# Altium PCB PCB1.PcbDoc (part 2 of 2)
Units mm, origin at the board's own origin, x right, y up, seen from the top; angles counter-clockwise.
Board outline 62.36 x 41.38 mm, 2 copper layers (Top Layer, Bottom Layer), stack 1.671 mm thick; 52 components, 47 nets, 174 pads, 61 vias.
Unrouted connection lines stored in the file: 1.
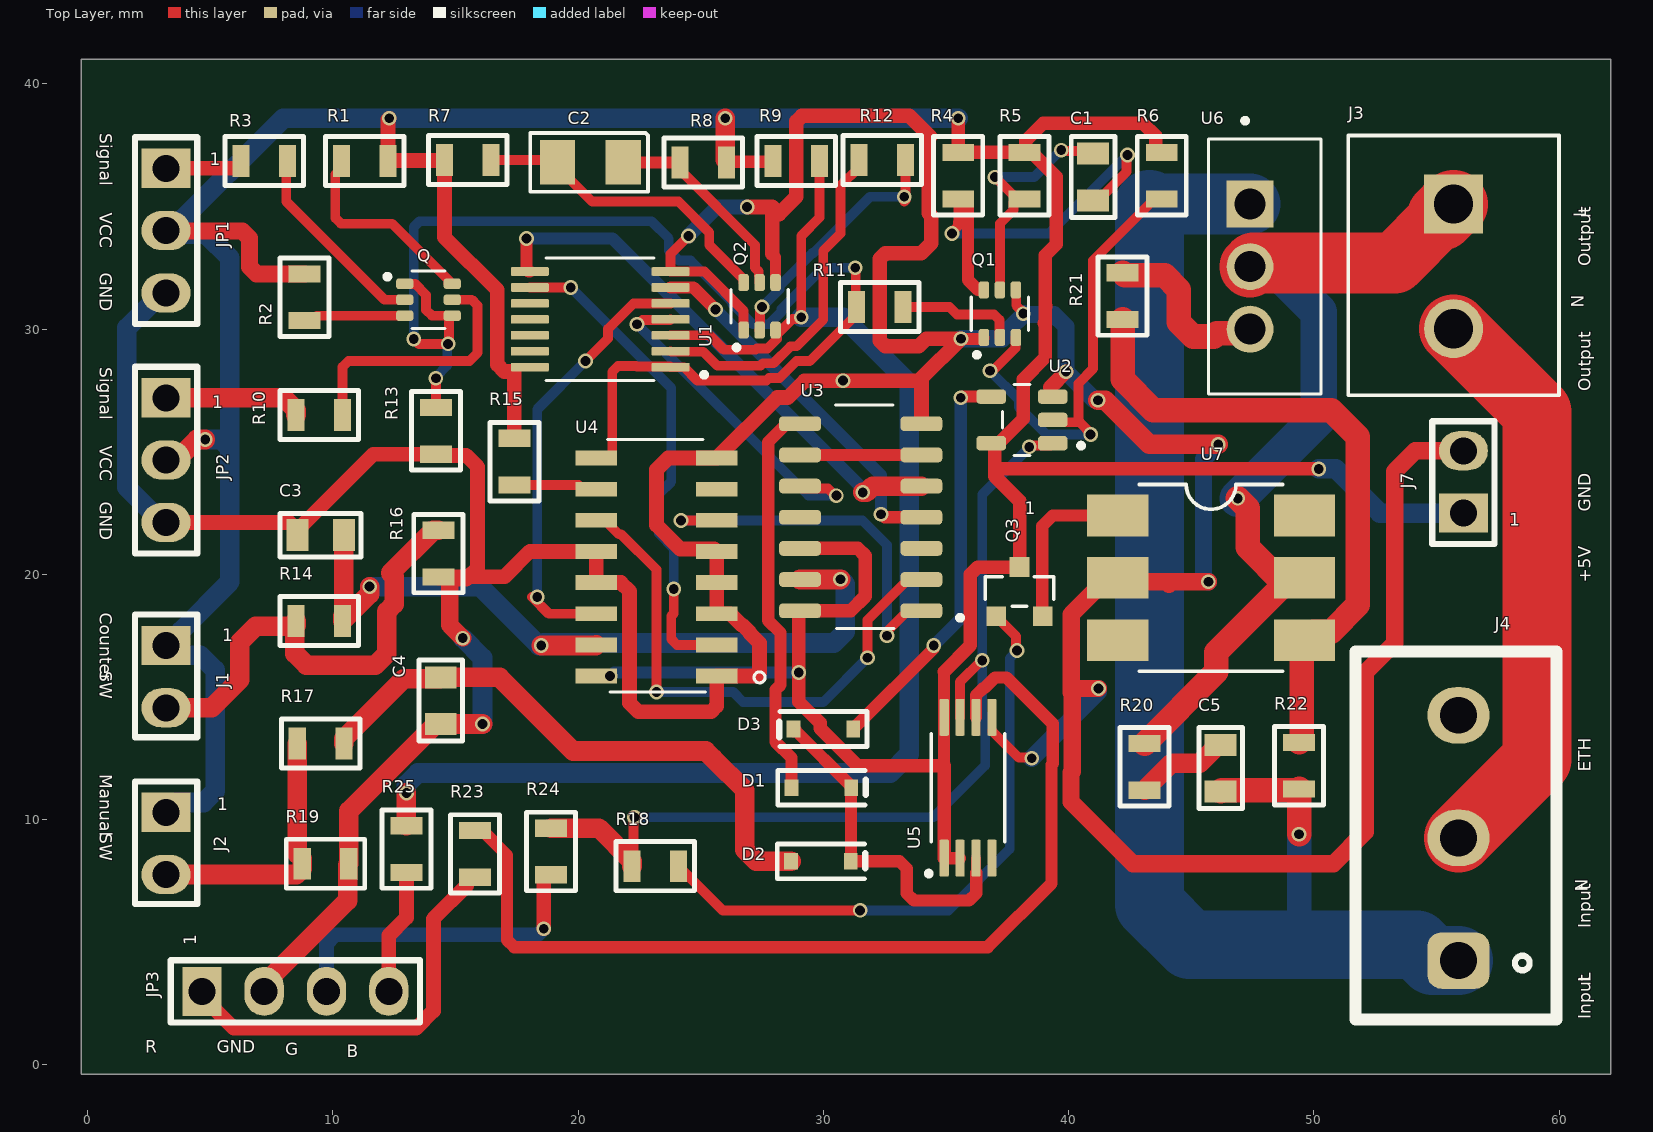
[diagram p0: Top Layer view]

## Via types
v1: diameter 0.6, hole 0.4, Top Layer to Bottom Layer, 61 vias

## Nets (pads, with @x,y where several pads share a name; then routed paths per layer and width w, separated by ;. In a path a pad name is that pad's centre, name@x,y a point inside that pad or via, vN(x,y) a via of type N, cw(c..) or ccw(c..) an arc to the next point about the centre after c; other vN are vias at no path point) (continued)
GND: (continued)
  Bottom Layer w0.6: v1(24.5,33.8) 25.683,34.983 v1(26.892,34.983)
  Bottom Layer w0.7: v1(35.616,29.61) 37.31,29.61 37.593,29.893 37.593,30.023 38.15,30.58 v1(38.15,30.634) ; v1@38.3,30.6 39.4,30.6 39.894,30.106 v1(39.894,28.268) 41.024,27.138 41.162,27.138 v1(41.2,27.1) ; v1(38.5,12.5) 41.217,15.217 v1(41.217,15.35) ; v1(45.7,19.7) 45.5,19.9 45.5,24.7 v1(46.1,25.3)
  Bottom Layer w0.8: JP2.3 3.028,22.12 1.6,23.548 1.6,30.05 3.028,31.478 JP1.3 ; v1(15.3,17.4) 16.1,16.6 v1(16.1,13.9)
"Line IN": C5.1 J4.1 R22.2 U6.1 | length 55.9
  Top Layer w1: C5.1 46.25,11.2 49.35,11.2 R22.2 v1(49.4,9.4)
  Bottom Layer w1: v1(49.4,9.4) 49.4,5.1 49.6,4.9
  Bottom Layer w2.5: 43.3,35.1 U6.1
  Bottom Layer w2.8: 43.3,35.1 43.3,6.54 44.94,4.9 49.6,4.9 54.2,4.9 54.847,4.253 J4.1
"Line OUT": J3.1 R20.2 U6.2 U7.5 | length 35
  Top Layer w1: R20.2 46.028,16.028 46.028,16.817 48.805,19.595 47.3,21.1 47.3,22.7 v1(46.9,23.1)
  Top Layer w2.5: U6.2 47.545,32.695 53.295,32.695 J3.1@55.2,34.6
  Top Layer w2.8: J3.1@55.2,34.6 J3.1
  Bottom Layer w1.5: v1(46.9,23.1) 50.2,26.4 50.2,30.7 48.428,32.472 47.478,32.472 U6.2
N: J3.2 J4.2 | length 23.5
  Top Layer w2.8: J3.2 59.1,26.62 59.1,12.453 J4.2
NetC1_1: C1.1 Q1.6 R4.1 | length 17
  Top Layer w0.4: v1(35.25,33.9) 35.25,33.954 35.479,34.183 35.479,34.379 35.5,34.4 R4.1 ; 36.307,31.6 Q1.6 ; C1.1 41.2,35.254 42.362,36.416 42.362,37.062 v1(42.4,37.1)
  Top Layer w0.5: R4.1 35.8,35.305 35.9,35.205 35.9,32.007 36.307,31.6
  Bottom Layer w0.4: v1(35.25,33.9) 39.2,33.9 v1(42.4,37.1)
NetC1_2: C1.2 Q1.5 R5.1 | length 10.4
  Top Layer w0.4: v1(37,36.2) 37.005,36.2 R5.1@37.9,35.305 ; Q1.5 37.2,34.305 37.75,34.855 37.75,35.155 R5.1@37.9,35.305 ; v1(39.7,37.3) 39.738,37.262 40.892,37.262 C1.2 ; R5.1@37.9,35.305 R5.1 R5.1@37.9,35.305
  Bottom Layer w0.4: v1(37,36.2) 38.6,36.2 v1(39.7,37.3)
NetC2_1: C2.1 Q2.6 R7.1 | length 12.9
  Top Layer w0.4: R7.1 19.064,36.9 C2.1 19.164,36.61 20.574,35.2 24.09,35.2 25.348,33.942 25.348,33.437 26.735,32.05 26.735,31.915 Q2.6
NetC2_2: C2.2 Q2.5 R8.1 | length 8.6
  Top Layer w0.4: R8.1 24.15,36.5 27.217,33.433 27.217,32.501 27.365,32.353 27.365,32.165 27.385,32.145 27.385,31.915 Q2.5
  Top Layer w0.5: C2.2 R8.1
NetC5_2: C5.2 R20.1 | length 3.7
  Top Layer w0.8: R20.1 44.2,12.3 45.35,12.3 C5.2@46.05,13
NetJ1_2: J1.2 R14.1 R16.1 | length 19.1
  Top Layer w0.8: J1.2 5.06,14.56 6.2,15.7 6.2,17.231 6.849,17.88 R14.1@8.449,17.88 ; R14.1 8.499,17.93 R14.1@8.449,17.88 ; R16.1 14.1,21.8 12.357,20.057 12.5,19.914 12.5,18.787 12.2,18.487 12.2,16.769 11.731,16.3 8.918,16.3 8.449,16.769 R14.1@8.449,17.88
NetJ2_2: J2.2 R17.1 R19.1 | length 10.8
  Top Layer w0.8: J2.2 8.51,7.76 8.75,8 R19.1 8.75,8.4 8.55,8.6 R17.1
NetJP1_1: JP1.1 R3.1 | length 3.3
  Top Layer w0.6: JP1.1 6.2,36.558 6.25,36.608 R3.1
NetJP2_1: JP2.1 R10.1 | length 5.7
  Top Layer w0.8: JP2.1 7.999,27.2 8.499,26.7 R10.1
NetJP3_1: JP3.1 R23.2 | length 16.8
  Top Layer w0.6: JP3.1 4.66,2.8 5.96,1.5 13.4,1.5 14.1,2.2 14.1,5.95 15.45,7.3 15.45,7.6 15.5,7.65 R23.2
NetJP3_3: JP3.3 R24.2 | length 13.5
  Top Layer w0.6: v1(18.6,5.55) 18.6,7.7 18.65,7.75 R24.2
  Bottom Layer w0.6: JP3.3 9.74,4.949 10.091,5.3 18.35,5.3 v1(18.6,5.55)
NetJP3_4: JP3.4 R25.2 | length 5.1
  Top Layer w0.6: JP3.4 12.28,5.275 13,5.995 R25.2
NetQ1_2: Q1.2 R11.2 | length 4.9
  Top Layer w0.4: R11.2 35.15,30.9 35.45,30.6 36.966,30.6 37.185,30.381 37.185,29.675 Q1.2
NetQ2_2: Q2.2 R12.2 | length 10.7
  Top Layer w0.4: Q2.2 27.415,29.975 27.415,30.761 27.5,30.846 v1(27.5,30.9) ; v1(33.3,35.4) 33.3,35.2 33.35,35.25 R12.2
  Bottom Layer w0.4: v1(27.5,30.9) 28.216,31.616 28.216,31.764 29.551,33.1 29.6,33.1 31.9,35.4 v1(33.3,35.4)
NetQ3_1: Q3.1 R18.2 | length 25.2
  Top Layer w0.4: R18.2 25.9,6.3 v1(31.5,6.3) ; Q3.1 37.862,17.478 37.862,16.938 v1(37.9,16.9)
  Bottom Layer w0.4: v1(31.5,6.3) 35.1,6.3 37.6,8.8 37.6,16.566 37.9,16.866 v1(37.9,16.9)
NetQ3_2: Q3.2 U7.1 | length 6.9
  Top Layer w0.5: Q3.2 38.95,18.42 38.93,18.44 38.93,21.977 39.353,22.4 U7.1
NetQ_2: Q.2 R3.2 | length 8.2
  Top Layer w0.4: R3.2 8.1,36.805 8.1,35.2 12.1,31.2 Q.2
NetQ_3: Q.3 R2.1 | length 4.2
  Top Layer w0.4: R2.1 9.149,30.35 9.349,30.55 Q.3
NetQ_5: Q.5 R10.2 | length 10.8
  Top Layer w0.4: R10.2 10.399,28.465 10.634,28.7 15.566,28.7 15.9,29.034 15.9,30.966 15.666,31.2 Q.5
NetQ_6: Q.6 R1.1 | length 8.4
  Top Layer w0.4: R1.1 10.35,36.555 10.1,36.305 10.1,34.534 10.334,34.3 12.42,34.3 14.72,32 14.72,31.865 14.735,31.85 Q.6
NetR15_1: R15.1 U4.10 | length 3.4
  Top Layer w0.4: R15.1 20.02,23.65 20.195,23.475 U4.10
NetR21_1: R21.1 R22.1 U7.4 | length 26.9
  Top Layer w1: R21.1 42.2,27.956 43.456,26.7 50.714,26.7 51.8,25.614 51.8,18.756 50.714,17.67 49.97,17.67 49.51,17.21 49.51,13.26 R22.1
NetR21_2: R21.2 U6.3 | length 7.2
  Top Layer w1: R21.2 42.3,32.2 43.914,32.2 44.5,31.614 44.5,30.286 45.086,29.7 45.914,29.7 46.04,29.826 47.226,29.826 U6.3
Q: R18.1 R24.1 U2.1 U5.7 | length 38.9
  Top Layer w0.4: R18.1 22.262,8.162 22.262,10.062 v1(22.3,10.1) ; U5.7 35.575,15.624 36.445,16.494 v1(36.481,16.494) ; v1(38.4,25.2) 38.454,25.2 38.509,25.255 39.26,25.255 U2.1
  Top Layer w0.8: R24.1 20.85,9.65 22.2,8.3 R18.1
  Bottom Layer w0.4: v1(22.3,10.1) 34.5,10.1 36.6,12.2 36.6,14.223 36.481,14.342 36.481,23.263 38.4,25.183 v1(38.4,25.2)
Q_BAR: R23.1 U5.6 | length 40.2
  Top Layer w0.5: R23.1 16.1,9.55 17.1,8.55 17.1,5.093 17.393,4.8 36.7,4.8 39.3,7.4 39.3,12.239 39.35,12.289 39.35,13.916 37.466,15.8 37,15.8 36.57,15.37 36.526,15.37 36.225,15.069 U5.6
"SENSOR INVERTED": R12.1 U1.2 | length 14.4
  Top Layer w0.4: U1.2 23.795,29.075 25.106,29.075 25.671,28.51 27.44,28.51 27.54,28.61 27.966,28.61 28.656,29.3 28.901,29.3 30,30.399 30,33.2 30.7,33.9 30.7,35.85 31.45,36.6 R12.1
"Sensor OUT": Q.1 Q.4 R11.1 R13.2 U1.1 U4.9 | length 51.5
  Top Layer w0.4: Q.1 12.945,31.835 13.363,31.835 13.8,31.398 13.8,30.784 14.034,30.55 Q.4@14.735,30.55 ; v1(13.3,29.6) 13.5,29.4 v1(14.7,29.4) 14.738,29.438 14.738,30.547 Q.4@14.735,30.55 ; R13.2 v1(14.2,28) ; Q.4 Q.4@14.735,30.55 ; U4.9 21.295,24.745 21.395,24.845 21.395,28.266 21.629,28.5 22.37,28.5 22.395,28.475 23.745,28.475 U1.1 24.32,28.45 24.86,27.91 27.689,27.91 27.789,28.01 28.215,28.01 28.905,28.7 29.45,28.7 31.35,30.6 R11.1 31.325,30.925 31.325,32.475 v1(31.3,32.5)
  Bottom Layer w0.4: v1(13.3,29.6) 13.3,34.166 13.534,34.4 22.99,34.4 23.7,33.69 23.7,33.21 24.11,32.8 24.59,32.8 26.3,31.09 26.3,31.019 27.119,30.2 27.79,30.2 28.3,30.71 28.3,30.82 29.98,32.5 v1(31.3,32.5) ; v1(14.2,28) 14.2,28.054 14.662,28.516 14.662,29.362 v1(14.7,29.4)
"Sensor Reset": Q1.3 R6.1 U2.2 | length 19.8
  Top Layer w0.4: v1(36.8,28.3) 36.838,28.338 36.946,28.338 37.835,29.227 37.835,29.645 Q1.3 ; U2.2 39.45,26.205 40.129,26.205 40.134,26.2 40.466,26.2 ; v1(40.9,25.7) 40.9,25.754 40.466,26.188 40.466,26.2 ; R6.1 43.5,35.305 41,32.805 41,28.384 40.4,27.784 40.4,26.266 40.466,26.2
  Bottom Layer w0.4: v1(36.8,28.3) 37.969,27.131 37.969,26.831 39.1,25.7 v1(40.9,25.7)
"SW O/P": C3.1 R14.2 U3.13 U4.15 | length 32.1
  Top Layer w0.8: C3.1 10.45,18.351 10.399,18.3 R14.2 11.5,19.201 v1(11.5,19.5) ; v1(18.5,17.1) 20.72,17.1 U4.15 ; U3.13 30.69,19.79 v1(30.7,19.8)
  Bottom Layer w0.8: v1(11.5,19.5) 16,19.5 18.4,17.1 v1(18.5,17.1) 18.6,17.2 30.431,17.2 30.9,17.669 30.9,19.6 v1(30.7,19.8)
"TRIGGER iNVERTED": U1.4 U3.10 | length 14.1
  Top Layer w0.4: v1(22.4,30.2) 22.454,30.2 22.629,30.375 23.745,30.375 U1.4 ; U3.10 29.15,23.5 30.19,23.5 30.478,23.212 v1(30.532,23.212)
  Bottom Layer w0.4: v1(22.4,30.2) 29.388,23.212 v1(30.532,23.212)
"Trigger O/P": Q2.3 R9.1 R25.1 U1.3 | length 56.3
  Top Layer w0.4: U1.3 25.35,29.75 25.94,29.16 27.242,29.16 27.292,29.21 27.718,29.21 28.108,29.601 28.108,29.781 28.745,30.418 29.1,30.418 29.1,33.8 29.85,34.55 R9.1
  Top Layer w0.8: R25.1 v1(13,11.086)
  Bottom Layer w0.8: v1(13,11.086) 13,11.431 13.469,11.9 32.731,11.9 33.5,12.669 33.5,27.8 30.812,30.488 v1(29.1,30.488)
pads on no net: J4.3 U1.10 U1.11 U1.12 U1.13 U3.3 U3.11 U4.7 U5.4 U7.3 U7.6

## Silkscreen, mask and mechanical layers (free items; w line width, h text height)
Top Overlay:
  text "Signal" at 0.5,37.98 h0.5 r270
  text "VCC" at 0.5,34.739 h0.5 r270
  text "L" at 61.1,34.56 h0.5 r90
  text "Output" at 61.3,32.56 h0.5 r90
  text "GND" at 0.5,32.306 h0.5 r270
  text "N" at 61,30.874 h0.5 r90
  text "Signal" at 0.5,28.447 h0.5 r270
  text "Output" at 61.3,27.46 h0.5 r90
  text "VCC" at 0.5,25.239 h0.5 r270
  text "GND" at 0.5,22.966 h0.5 r270
  text "GND" at 61.3,22.56 h0.5 r90
  text "+5V" at 61.3,19.66 h0.5 r90
  text "Counter" at 0.5,18.44 h0.5 r270
  text "SW" at 0.5,16.04 h0.5 r270
  text "ETH" at 61.3,11.96 h0.5 r90
  text "Manual" at 0.5,11.84 h0.5 r270
  text "SW" at 0.5,9.44 h0.5 r270
  text "N" at 61.165,7.066 h0.5 r90
  text "Input" at 61.3,5.566 h0.5 r90
  text "L" at 61.3,3.36 h0.5 r90
  text "Input" at 61.3,1.86 h0.5 r90
  text "R" at 2.36,0.5 h0.5
  text "GND" at 5.26,0.5 h0.5
  text "G" at 8.06,0.4 h0.5
  text "B" at 10.561,0.302 h0.5
Bottom Overlay:
  lines w0.15: 38.9,2.55 54.4,2.55 57.4,2.55 57.6,2.55 57.6,6.15 54.4,6.15 54.4,7.5 57.6,7.5 57.6,10.85 54.4,10.85 54.4,21.2 57.7,21.2 57.7,26.3 54.4,26.3 54.4,26.55 38.9,26.55 38.9,3.05
Mechanical 13:
  lines w0.3: -0.2,-0.3 61.8,-0.3 62,-0.3 62,40.9 -0.1,40.9 -0.2,41 -0.2,-0.3

## Dimensions
-0.4,-0.1 to 62,-0.3 on Dimensions
-0.1,40.9 to -0.4,-0.1 on Dimensions

## Text inside footprints (layer, text, board x,y; h text height)
J1: Top Overlay "1" at 5.48,17.28 h0.5
J2: Top Overlay "1" at 5.28,10.38 h0.5
J7: Top Overlay "1" at 57.98,21.98 h0.5
JP1: Top Overlay "1" at 4.98,36.68 h0.5
JP2: Top Overlay "1" at 5.08,26.78 h0.5
JP3: Top Overlay "1" at 4.42,4.88 h0.5 r90
U7: Mechanical 1 "1" at 38.213,22.46 h0.5; Top Overlay "1" at 38.213,22.46 h0.5